# Altium PCB AC_board.PcbDoc (part 1 of 3)
Units mil, origin at the board's own origin, x right, y up, seen from the top; angles counter-clockwise.
Board outline 5905.51 x 3937.01 mil, 4 copper layers (Top Layer, Layer 1, Layer 2, Bottom Layer), stack 31.891 mil thick; 28 components, 29 nets, 132 pads, 3623 vias.
Unrouted connection lines stored in the file: 10.
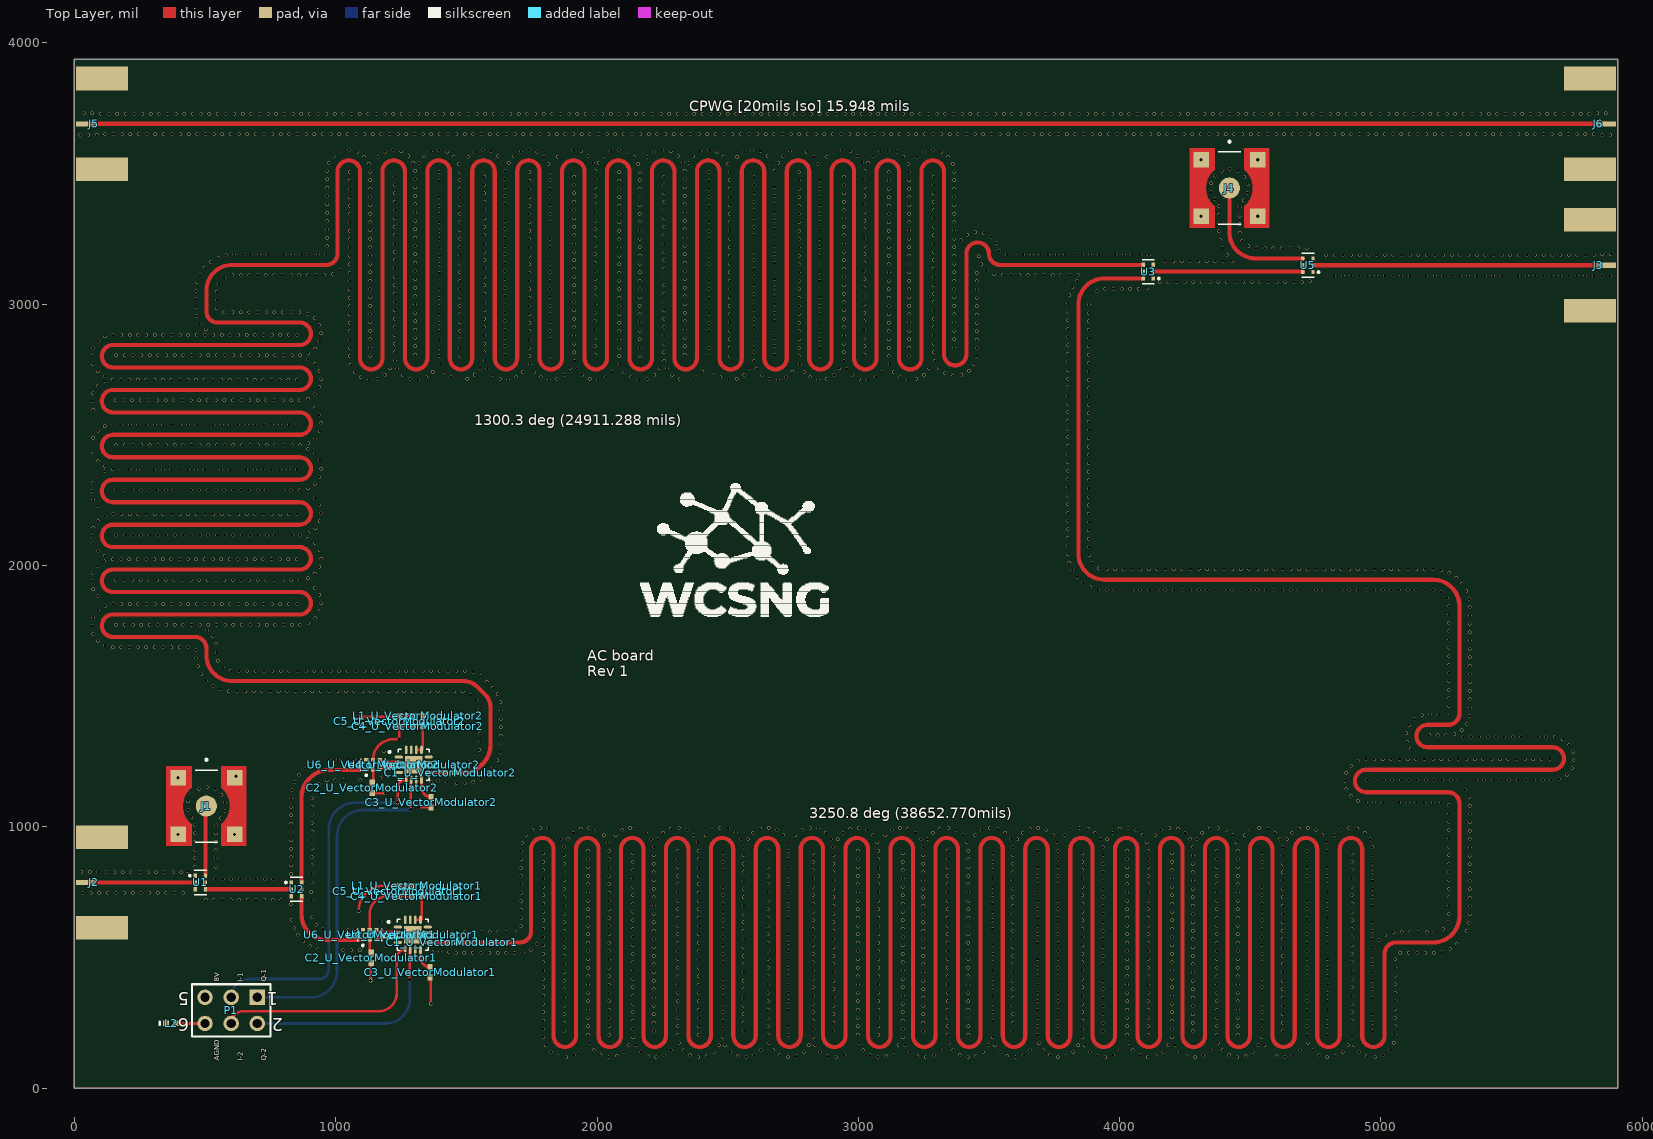
[diagram p0: Top Layer view]
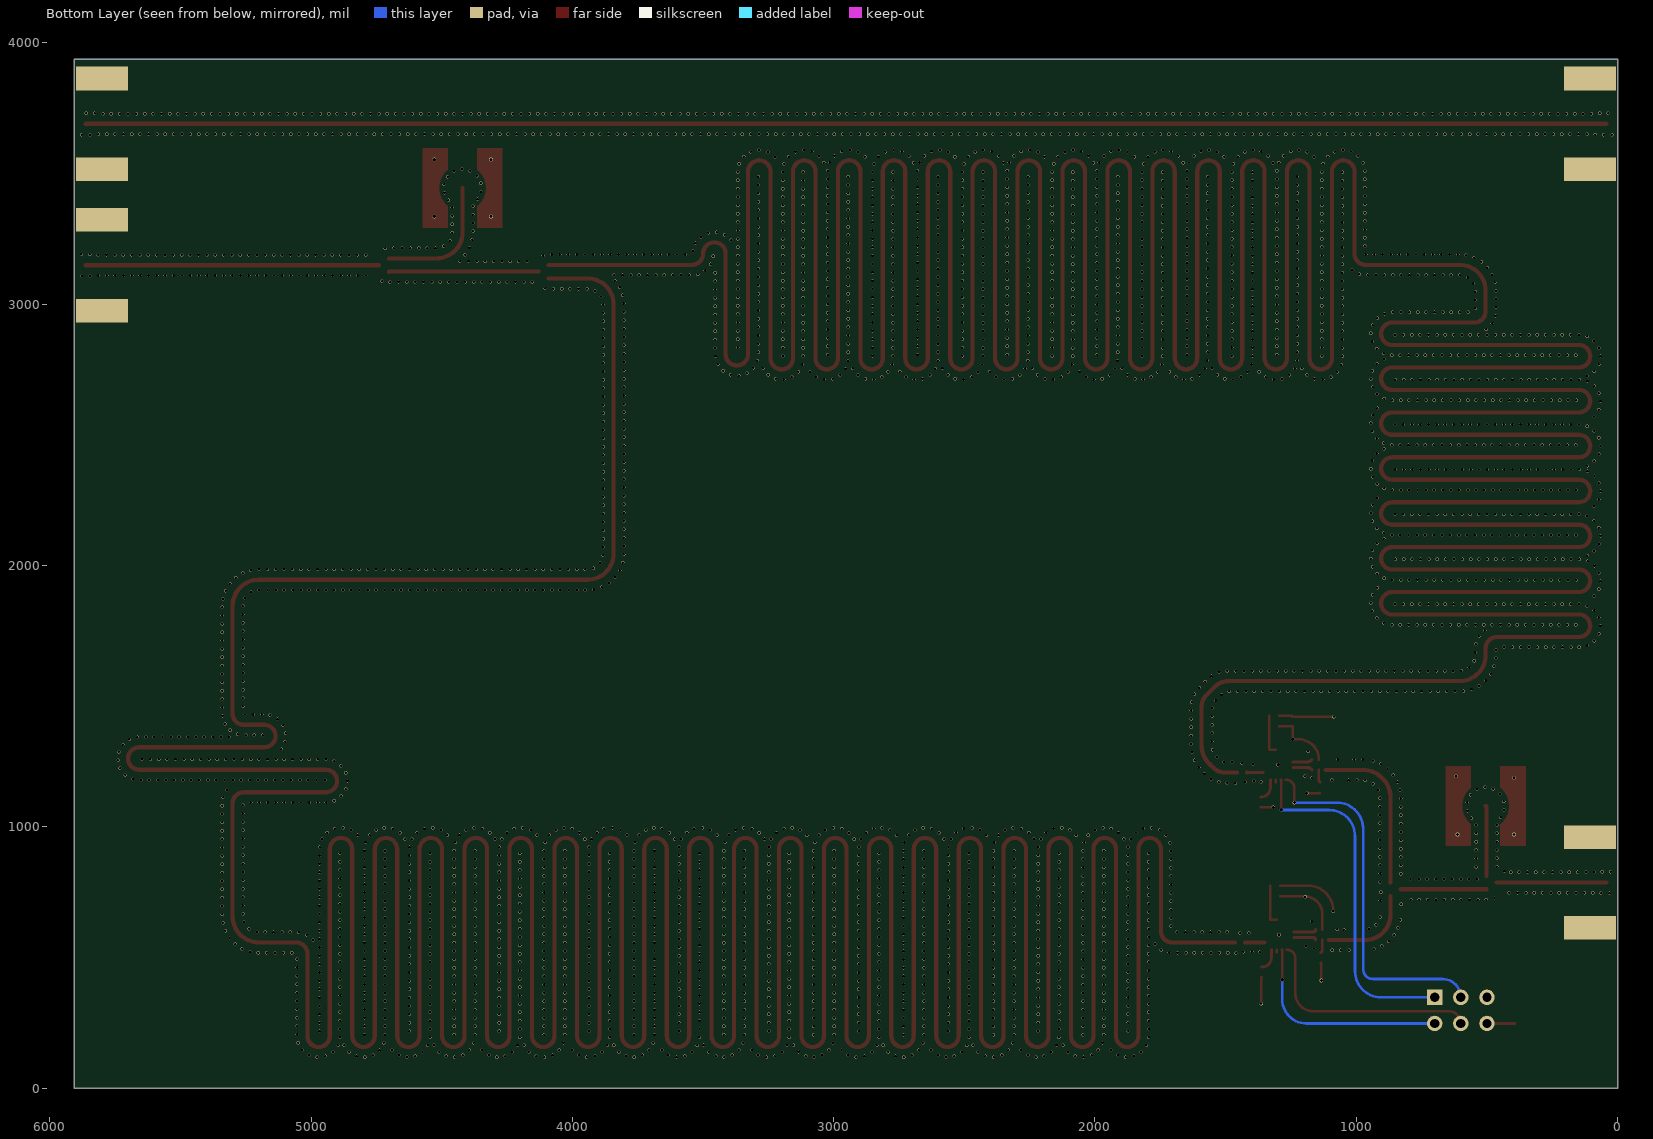
[diagram p1: Bottom Layer view, seen from below]
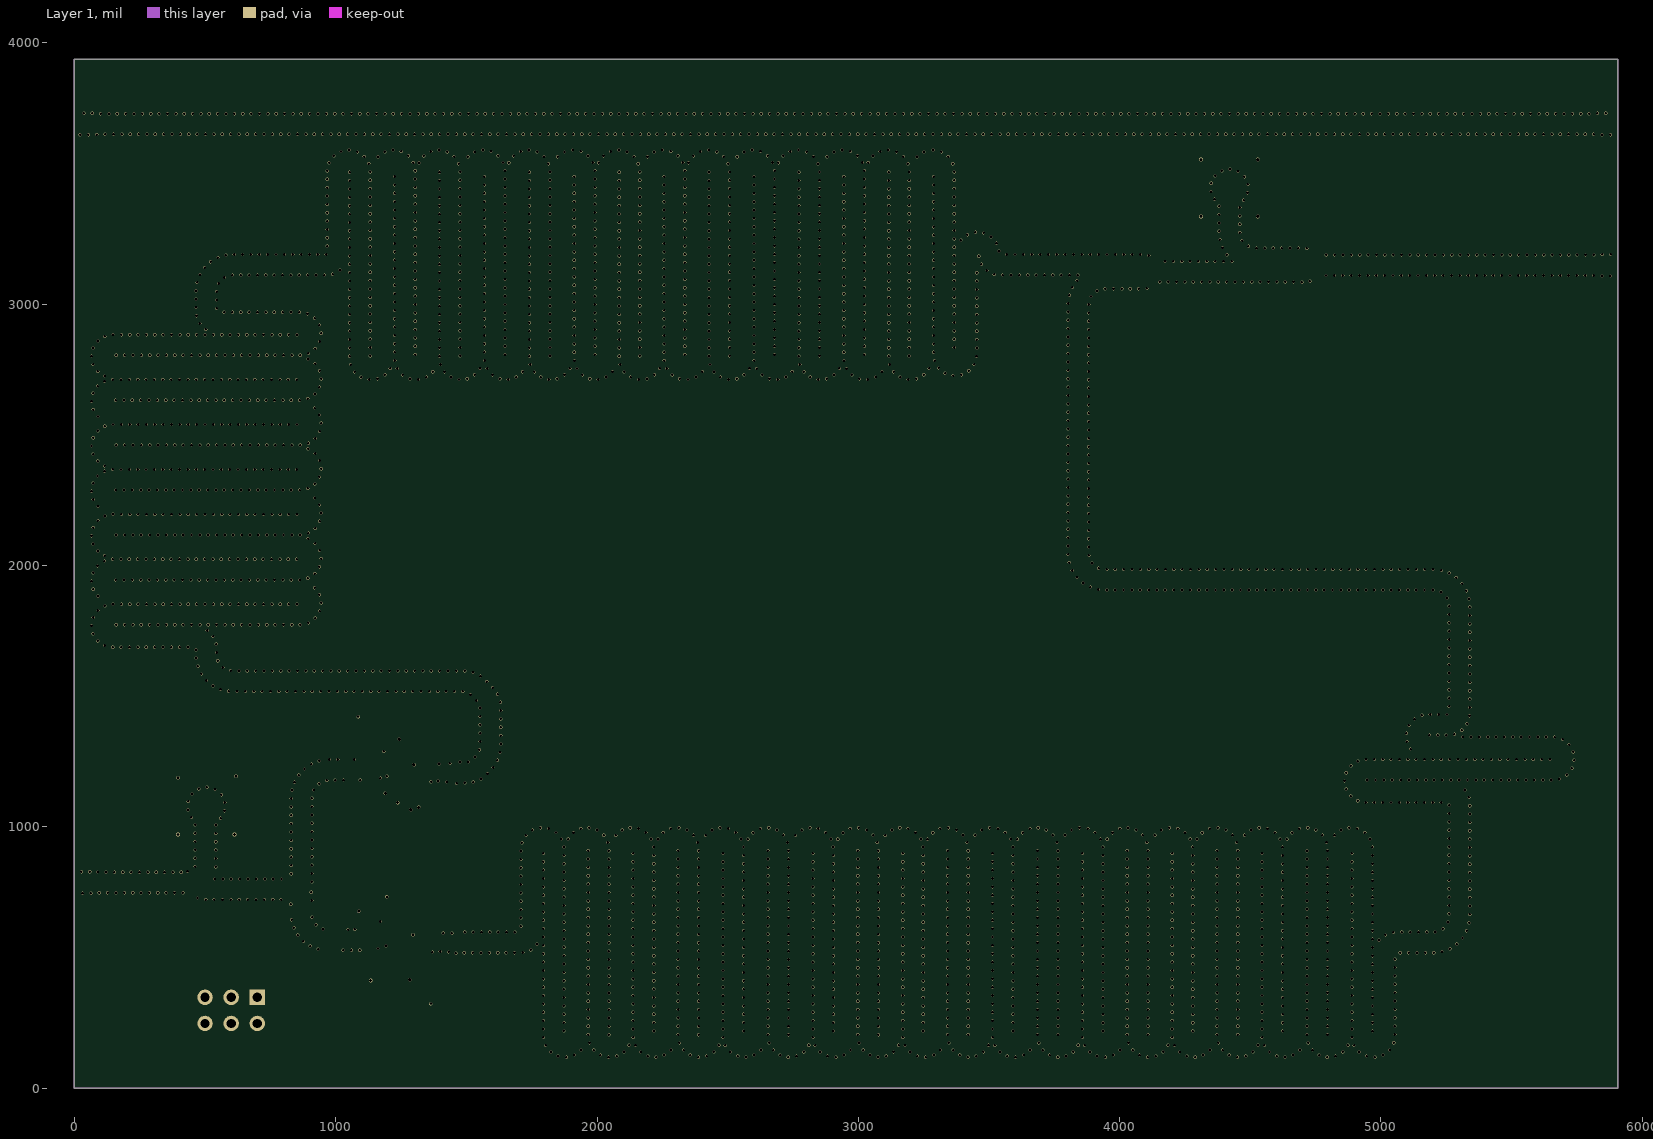
[diagram p2: Layer 1]
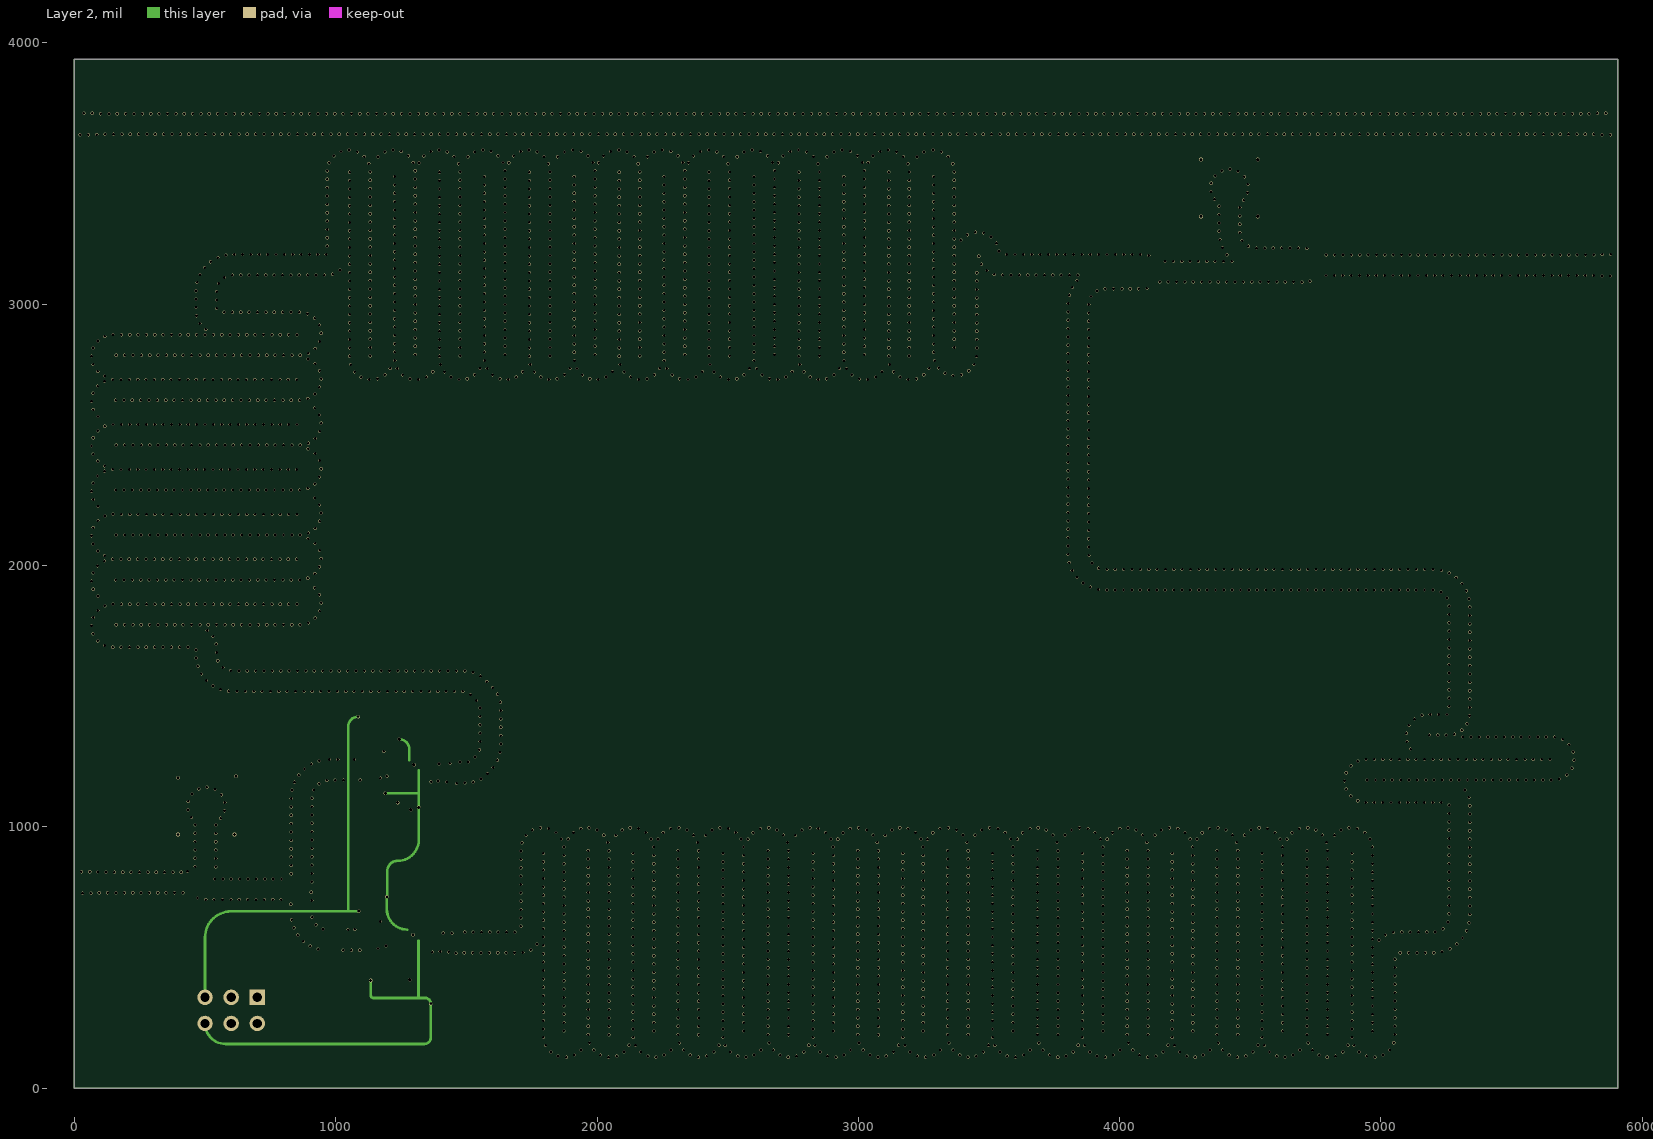
[diagram p3: Layer 2]

## Layer stack, top to bottom
Top Solder: solder mask 0.4, Solder Resist, Dk 3.5
Top Layer: signal copper 1.3778
Isola 408HR-1: prepreg 6.8898, FR4, Dk 3.64
Layer 1: signal copper 1.3778
Isola 408HR-Core: dielectric 12.6, FR-4, Dk 3.64
Layer 2: signal copper 1.3778
Isola 408HR-2: prepreg 6.8898, FR4, Dk 3.64
Bottom Layer: signal copper 1.3778
Bottom Solder: solder mask 0.4, Solder Resist, Dk 3.5

## Board outline
0,0 5905.51,0 5905.51,3937.01 0,3937.01

## Design rules (kind name [scope] priority, off if disabled: settings)
BoardOutlineClearance [All] p1: gap=10 ignorepadtopadclearanceinfootprint=FALSE
Clearance "Schematic Clearance Constraint_1" [InNetClass('HMC RF IN')] p1: gap=5 ignorepadtopadclearanceinfootprint=FALSE
Clearance "Schematic Clearance Constraint" [InNetClass('RF Nets')] p2: gap=20 ignorepadtopadclearanceinfootprint=FALSE except(3: Arc-SMDPad Track-SMDPad SMDPad-SMDPad)
Clearance "HMC RF IN Clearance" [InNetClass('HMC RF IN')] p3: gap=5 ignorepadtopadclearanceinfootprint=FALSE
Clearance [All] p4: gap=10 ignorepadtopadclearanceinfootprint=FALSE except(0: Arc-Hole Track-Hole SMDPad-Hole THPad-Hole Via-Hole Fill-Hole Poly-Hole Region-Hole Text-Hole; 6: Arc-Arc Arc-Track Arc-SMDPad Track-Track Track-SMDPad SMDPad-SMDPad)
Clearance "RF Clearance" [InNetClass('RF Nets')] p5: gap=20 ignorepadtopadclearanceinfootprint=FALSE except(3: Arc-SMDPad Track-SMDPad SMDPad-SMDPad; 6: Arc-Arc Arc-Track Track-Track)
Length "Tap 2 Length" [InNet('No Net') And OnLayer('Top Layer')] p1: maxlimit=38652.77 minlimit=38652.77
Length "Tap 1 Length" [InNet('No Net') And OnLayer('Top Layer')] p2: maxlimit=24911.29 minlimit=24911.29
MatchedLengths [InNetClass('Taps')] p1: tolerance=0 checknetsindiffpair=FALSE checkdiffpairvsdiffpair=TRUE checkxsignals=TRUE checkothers=TRUE
MinimumSolderMaskSliver [All] p1: minsoldermaskwidth=0
PlaneConnect [All] p1: planeconnectstyle=Direct reliefexpansion=20 reliefentries=4 reliefconductorwidth=10 reliefairgap=10
PolygonConnect [All] p1: connectstyle=Direct reliefconductorwidth=10 reliefentries=4 polygonreliefangle="90 Angle" airgapwidth=10
RoomDefinition U_VectorModulator2 [InComponentClass('U_VectorModulator2')] p1: confinementstyle=ConfineIn formatcopy=TRUE lockcomponents=FALSE outline 1063.74,1045.2 1493.74,1045.2 1493.74,1470.2 1063.74,1470.2
RoomDefinition U_VectorModulator1 [InComponentClass('U_VectorModulator1')] p2: confinementstyle=ConfineIn formatcopy=TRUE lockcomponents=FALSE outline 1060,394.68 1490,394.68 1490,819.68 1060,819.68
RoomDefinition AC_board [InComponentClass('AC_board')] p3: confinementstyle=ConfineIn formatcopy=TRUE lockcomponents=FALSE outline 6290,-68.5 8920,-68.5 8920,626.5 6290,626.5
RoutingVias [All] p1: holewidth=12 width=14 viastyle="Through Hole" minholewidth=8 minwidth=10 maxholewidth=17 maxwidth=20
SilkToSolderMaskClearance [IsPad] p1: minsilkscreentomaskgap=5 clearancetoexposedcopper=TRUE
SolderMaskExpansion [All] p1: expansion=4 istentingtop=FALSE
Width "Schematic Width Constraint_1" [InNetClass('RF Nets')] p1: maxlimit=15.95 minlimit=15.95 preferedwidth=15.95
Width "Schematic Width Constraint" [InNetClass('HMC RF IN')] p2: maxlimit=11.83 minlimit=11.83 preferedwidth=11.83
Width "HMC RF IN Width" [InNetClass('HMC RF IN')] p3: maxlimit=11.83 minlimit=11.83 preferedwidth=11.83
Width "RF Width" [InNetClass('RF Nets')] p4: maxlimit=15.95 minlimit=15.95 preferedwidth=15.95
Width [All] p5: maxlimit=10 minlimit=10 preferedwidth=10
27 further rules are at their usual default settings.

## Classes and differential pairs
net class "HMC RF IN": HMCIN_U_VectorModulator1 HMCIN_U_VectorModulator2 HMCINbar_U_VectorModulator1 HMCINbar_U_VectorModulator2
net class "RF Nets": B-IP B-OP NetJ5_SIG RF-C1 RF-C1-1 RF-C1-2 RF-S1 RF-S2-1 RF-S2-2 RXin TXout
channel class VectorModulator: U_VectorModulator1 U_VectorModulator2
component class U_VectorModulator2: C1_U_VectorModulator2 C2_U_VectorModulator2 C3_U_VectorModulator2 C4_U_VectorModulator2 C5_U_VectorModulator2 L1_U_VectorModulator2 U4_U_VectorModulator2 U6_U_VectorModulator2
component class U_VectorModulator1: C1_U_VectorModulator1 C2_U_VectorModulator1 C3_U_VectorModulator1 C4_U_VectorModulator1 C5_U_VectorModulator1 L1_U_VectorModulator1 U4_U_VectorModulator1 U6_U_VectorModulator1
component class AC_board: J1 J2 J3 J4 J5 J6 L2 P1 U1 U2 U3 U5

## Components (designator, comment, footprint, x,y, rotation, side; value= is the part's Value field where it differs from the comment)
C1_U_VectorModulator1 "Cap Semi" 0402 1445.68,558 r0 top value=100pF (schematic designator C1)
C1_U_VectorModulator2 "Cap Semi" 0402 1438,1208 r0 top value=100pF (schematic designator C1)
C2_U_VectorModulator1 "Cap Semi" 0402 1136.26,499.17 r90 top value=100pF (schematic designator C2)
C2_U_VectorModulator2 "Cap Semi" 0402 1140,1149.68 r90 top value=100pF (schematic designator C2)
C3_U_VectorModulator1 "Cap Semi" 0402 1361.26,444.17 r90 top value=100pF (schematic designator C3)
C3_U_VectorModulator2 "Cap Semi" 0402 1365,1094.68 r90 top value=100pF (schematic designator C3)
C4_U_VectorModulator1 "Cap Semi" 0402 1310.26,734.49 r0 top value=100pF (schematic designator C4)
C4_U_VectorModulator2 "Cap Semi" 0402 1314,1385 r0 top value=100pF (schematic designator C4)
C5_U_VectorModulator1 "Cap Semi" 0402 1241.26,754.17 r90 top value=100pF (schematic designator C5)
C5_U_VectorModulator2 "Cap Semi" 0402 1245,1404.68 r90 top value=100pF (schematic designator C5)
J1 "CONSMA001-SMD-G" *LINX_CONSMA001-SMD-G_CONSMA001-SMD-G(Primary) 505,1080 r0 top
J2 "SMA 50 Ohm edge" "SMA-OSHPARK-4L-1.6MM- ALT3" 5,787.4 r0 top locked
J3 "SMA 50 Ohm edge" "SMA-OSHPARK-4L-1.6MM- ALT3" 5900.51,3149.61 r180 top locked
J4 "CONSMA001-SMD-G" *LINX_CONSMA001-SMD-G_CONSMA001-SMD-G(Primary) 4420,3445 r0 top
J5 "SMA 50 Ohm edge" "SMA-OSHPARK-4L-1.6MM- ALT3" 5,3690 r0 top locked
J6 "SMA 50 Ohm edge" "SMA-OSHPARK-4L-1.6MM- ALT3" 5900.51,3690 r180 top locked
L1_U_VectorModulator1 "Inductor" 0402-A 1310.26,775.49 r0 top value=10mH (schematic designator L1)
L1_U_VectorModulator2 "Inductor" 0402-A 1314,1426 r0 top value=10mH (schematic designator L1)
L2 "Inductor" 0402-A 370.08,249.02 r0 top value=10mH
P1 "Header 3X2" HDR2X3 700,348 r180 top
U1 "Anaren PD0810J5050S2HF" *ANAREN_PD0409J7575S2HF 482.09,787.4 r0 top
U2 "Anaren PD0810J5050S2HF" *ANAREN_PD0409J7575S2HF 850,761 r0 top
U3 "Anaren PD0810J5050S2HF" *ANAREN_PD0409J7575S2HF 4109.49,3125 r180 top
U4_U_VectorModulator1 "HMC630" *QFN50P300X300X100-17N 1295.16,587.4 r0 top (schematic designator U4)
U4_U_VectorModulator2 "HMC630" *QFN50P300X300X100-17N 1298.9,1237.91 r0 top (schematic designator U4)
U5 "Anaren PD0810J5050S2HF" *ANAREN_PD0409J7575S2HF 4720.51,3149.61 r180 top
U6_U_VectorModulator1 "ANAREN_BD0810J50100AHF" *ANAREN_PD0409J7575S2HF 1130,587 r90 top (schematic designator U6)
U6_U_VectorModulator2 "ANAREN_BD0810J50100AHF" *ANAREN_PD0409J7575S2HF 1143,1238 r90 top (schematic designator U6)

## Footprints (in the part's own frame and the unit in brackets; to place one, negate y for a bottom-side part, rotate by r counter-clockwise, add the part's x,y. Pads: shape width x height; smd on the part's side, far side on the other; paste and mask are expansions set on the pad)
0402 [mm] "Chip Capacitor, Body 1.0x0.5mm, IPC High Density"
  rect 0.6x0.5 smd: 1(-0.5,0) 2(0.5,0)
  body extent -0.55,-0.3 0.55,0.3, height 1.3
0402-A [mm] "Chip Inductor, Body 1.0x0.5mm, IPC High Density"
  rect 0.6x0.5 smd: 1(-0.5,0) 2(0.5,0)
  silkscreen extent -1.1,-0.15 -1.1,0.15, body extent -0.55,-0.3 0.55,0.3, height 0.55
*ANAREN_PD0409J7575S2HF [mm]
  rect 0.33x0.41 smd: 1(-0.495,0.66) 2(-0.495,0) 3(-0.495,-0.66) 4(0.495,-0.66) 5(0.495,0) 6(0.495,0.66)
  silkscreen extent -1.05,-1.17 0.6,1.17
*LINX_CONSMA001-SMD-G_CONSMA001-SMD-G(Primary) [mm]
  round 2.05 smd: C(0,0)
  rect 1.5x1.5 smd: G1(-2.75,2.75) G2(-2.75,-2.75) G3(2.75,-2.75) G4(2.75,2.75)
  Top Layer region: 1.44,-3.88 1.44,-1.76 1.54,-1.68 1.573,-1.651 1.663,-1.56 1.747,-1.465 1.827,-1.365 1.9,-1.26 1.968,-1.152 2.029,-1.04 2.085,-0.925 2.133,-0.807 2.175,-0.686 2.21,-0.564 2.239,-0.439 2.26,-0.313 2.274,-0.186 2.281,-0.059 2.281,0.069 2.274,0.196 2.26,0.323 2.239,0.449 2.21,0.574 2.175,0.696 2.133,0.817 2.085,0.935 2.029,1.05 1.968,1.162 1.9,1.27 1.827,1.375 1.747,1.475 1.663,1.57 1.573,1.661 1.54,1.69 1.44,1.76 1.44,3.88 3.88,3.88 3.88,-3.88 1.44,-3.88
  Top Layer region: -1.44,3.88 -1.44,1.76 -1.54,1.68 -1.6,1.624 -1.687,1.534 -1.769,1.439 -1.845,1.34 -1.916,1.237 -1.981,1.13 -2.04,1.02 -2.093,0.907 -2.139,0.791 -2.18,0.672 -2.213,0.552 -2.241,0.43 -2.261,0.307 -2.275,0.182 -2.281,0.058 -2.281,-0.067 -2.275,-0.192 -2.261,-0.317 -2.241,-0.44 -2.213,-0.562 -2.18,-0.682 -2.139,-0.801 -2.093,-0.917 -2.04,-1.03 -1.981,-1.14 -1.916,-1.247 -1.845,-1.35 -1.769,-1.449 -1.687,-1.544 -1.6,-1.634 -1.54,-1.69 -1.44,-1.76 -1.44,-3.88 -3.88,-3.88 -3.88,3.88 -1.44,3.88
  silkscreen extent -1.1,-3.5 1.1,4.6
*QFN50P300X300X100-17N [mm]
  oval 0.8x0.26 smd: 1(-1.455,0.75) 2(-1.455,0.25) 3(-1.455,-0.25) 4(-1.455,-0.75) 9(1.455,-0.75) 10(1.455,-0.25) 11(1.455,0.25) 12(1.455,0.75)
  oval 0.26x0.8 smd: 5(-0.75,-1.455) 6(-0.25,-1.455) 7(0.25,-1.455) 8(0.75,-1.455) 13(0.75,1.455) 14(0.25,1.455) 15(-0.25,1.455) 16(-0.75,1.455)
  rect 1.7x1.7 smd: 17(0,0)
  silkscreen extent -2.45,-1.5 1.5,1.5
HDR2X3 [mm] "Connector; Header; 3x2 Position"
  rect 1.5x1.5 hole 0.9: 1(0,0)
  round 1.5 hole 0.9: 2(0,2.54) 3(2.54,0) 4(2.54,2.54) 5(5.08,0) 6(5.08,2.54)
  silkscreen extent -1.27,-1.27 6.35,3.81
"SMA-OSHPARK-4L-1.6MM- ALT3" [mil] "Short and thin signal pin"
  rect 200x90 smd: GND(101,-174) GND(101,174)
  rect 200x90 smd far side: GND(101,-174) GND(101,174)
  rect 75x20 smd: SIG(38.5,0)

## Part data
C1_U_VectorModulator1 C1_U_VectorModulator2 C2_U_VectorModulator1 C2_U_VectorModulator2 C3_U_VectorModulator1 C3_U_VectorModulator2 C4_U_VectorModulator1 C4_U_VectorModulator2 C5_U_VectorModulator1 C5_U_VectorModulator2: "Capacitor (Semiconductor SIM Model)", LatestRevisionDate=29-May-2009, LatestRevisionNote="IPC-7351 Footprint Added.", PackageDescription="Chip Capacitor", PackageReference=C1206, Published=8-Jun-2000, Publisher="Altium Limited"
J1 J4: "50 Ohm Gold Plated Female PCB Mount SMA Connector", Package=None, Supplier Part Number 1=CONSMA001-SMD-G-ND, Digi-Key_Part_Number=CONSMA001-SMD-G-ND, Digi-Key_Purchase_URL=https://www.digikey.com/product-detail/en/linx-technologies-inc/CONSMA001-SMD-G/CONSMA001-SMD-G-ND/4496569?utm_source=snapeda&utm_medium=aggregator&utm_campaign=symbol, MF="Linx Technologies", MP=CONSMA001-SMD-G, SnapEDA_Link=https://www.snapeda.com/parts/CONSMA001-SMD-G/Linx%20Technologies%20Inc./view-part/?ref=snap, Supplier 1=Digi-Key
J2 J3 J5 J6: library part SMA-OSHPARK-4L-1.6MM-ALT3, Package=SMA-OSHPARK-4L-1.6MM, Supplier Part Number 1=J658-ND, DeviceName=-OSHPARK-4L-1.6MM, DeviceSetName=SMA, GateName_1=G1, LibraryName=dword1511-connectors, Supplier 1=Digi-Key, SymbolName_1=COAX
P1: "Header, 3-Pin, Dual row", LatestRevisionDate=17-Jul-2002, LatestRevisionNote="Re-released for DXP Platform.", Publisher="Altium Limited"
U1 U2 U3 U5: Supplier Part Number 1=1173-1093-1-ND, Supplier 1=Digi-Key, U*=1173-1093-1-ND
U4_U_VectorModulator1 U4_U_VectorModulator2: Supplier Part Number 1=1127-1497-ND, Supplier 1=Digi-Key
U6_U_VectorModulator1 U6_U_VectorModulator2: Supplier Part Number 1=1173-1056-1-ND, Supplier 1=Digi-Key
L1_U_VectorModulator1 L1_U_VectorModulator2 L2: Code_IEC=1005, Code_JEITA=0402, LatestRevisionDate=29-May-2009, LatestRevisionNote="IPC-7351 Footprint Added.", PackageDescription="Chip Inductor", PackageReference=0402-A, Published=8-Jun-2000, Publisher="Altium Limited"

## Via types
v1: diameter 12, hole 10, Top Layer to Bottom Layer, 3602 vias
v2: diameter 14, hole 12, Top Layer to Bottom Layer, 11 vias
v3: diameter 15, hole 12, Top Layer to Bottom Layer, 10 vias

## Nets (pads, with @x,y where several pads share a name; then routed paths per layer and width w, separated by ;. In a path a pad name is that pad's centre, name@x,y a point inside that pad or via, vN(x,y) a via of type N, cw(c..) or ccw(c..) an arc to the next point about the centre after c; other vN are vias at no path point)
8V: C5_U_VectorModulator1.2 C5_U_VectorModulator2.2 L1_U_VectorModulator1.1 L1_U_VectorModulator2.1 P1.5 | length 2110.2
  Top Layer w10: v2(1086,1422) 1242.63,1422 ccw(c1242.63,1426) 1246.63,1426 L1_U_VectorModulator2.1@1294.32,1426 ; v2(1088,678) cw(c1185.49,678) 1185.49,775.49 L1_U_VectorModulator1.1@1290.57,775.49
  Layer 1 w10: v2@1087,677 ccw(c1087,678) v2(1088,678)
  Layer 2 w10: P1.5@500,348 500,577 cw(c600,577) 600,677 1048,677 ; v2(1086,1422) ccw(c1086,1384) 1048,1384 1048,677 ; v2@1087,677 1048,677
AGND: C2_U_VectorModulator1.1 C2_U_VectorModulator2.1 C3_U_VectorModulator1.1 C3_U_VectorModulator2.1 C4_U_VectorModulator1.1 C4_U_VectorModulator2.1 C5_U_VectorModulator1.1 C5_U_VectorModulator2.1 J1.G1 J1.G2 J1.G3 J1.G4 J2.GND J3.GND J4.G1 J4.G2 J4.G3 J4.G4 J5.GND J6.GND L2.1 L2.2 P1.6 U1.1 U1.3 U1.5 U2.1 U2.3 U2.5 U3.1 U3.3 U3.5 U4_U_VectorModulator1.17 U4_U_VectorModulator2.17 U5.1 U5.3 U5.5 U6_U_VectorModulator1.5 U6_U_VectorModulator2.5 | length 3416.2
  Top Layer w10: L2.2@393.67,248 P1.6@500,248 ; U6_U_VectorModulator1.5@1130,606.49 1130,666.42 cw(c1198.07,666.42) 1198.07,734.49 C5_U_VectorModulator1.1@1241.26,734.49 C4_U_VectorModulator1.1@1290.57,734.49 ; v2(1133.86,412.4) 1133.86,477.09 cw(c1136.26,477.09) C2_U_VectorModulator1.1@1136.26,479.49 ; C2_U_VectorModulator2.1@1140,1130 ccw(c1141.06,1130) 1141.06,1128.94 v2(1189.96,1128.94) ; U6_U_VectorModulator2.5@1143,1257.49 cw(c1221.14,1257.49) 1221.14,1335.63 v2(1243.11,1335.63) 1243.11,1383.11 cw(c1245,1383.11) C5_U_VectorModulator2.1@1245,1385 C4_U_VectorModulator2.1@1294.32,1385 ; v2(1317.91,1074.8) 1365,1074.8 C3_U_VectorModulator2.1@1365,1075 ; C3_U_VectorModulator1.1@1361.26,424.49 cw(c1361.26,421.57) 1364.17,421.57 v2(1364.17,323.82)
  Layer 2 w10: P1.6@500,248 ccw(c578.71,248) 578.71,169.29 1338.58,169.29 ccw(c1338.58,194.88) 1364.17,194.88 v2(1364.17,323.82) ccw(c1342.52,323.82) 1342.52,345.47 1313.98,345.47 ; v2(1133.86,412.4) 1133.86,356.3 ccw(c1144.68,356.3) 1144.68,345.47 1313.98,345.47 ; v2(1189.96,1128.94) 1312.99,1128.94 cw(c1312.99,1124.02) 1317.91,1124.02 ; v2(1243.11,1335.63) cw(c1243.11,1297.24) 1281.5,1297.24 1281.5,1254.92 ; 1273.62,607.28 cw(c1273.62,685.04) 1195.87,685.04 v2(1195.87,732.28) cw(c1195.87,731.3) 1196.85,731.3 1196.85,829.72 cw(c1237.2,829.72) 1237.2,870.08 ccw(c1237.2,950.79) 1317.91,950.79 v2(1317.91,1074.8) 1317.91,1124.02 ; 1316.93,563.98 1316.93,348.43 cw(c1313.98,348.43) 1313.98,345.47 ; 1317.91,1217.52 1317.91,1124.02